# Altium PCB ADS1256.PcbDoc
Units mil, origin at the board's own origin, x right, y up, seen from the top; angles counter-clockwise.
Board outline 2300 x 1853 mil, 4 copper layers (Top Layer, Layer 1, Layer 2, Bottom Layer), stack 23.756 mil thick; 127 components, 75 nets, 419 pads, 325 vias.
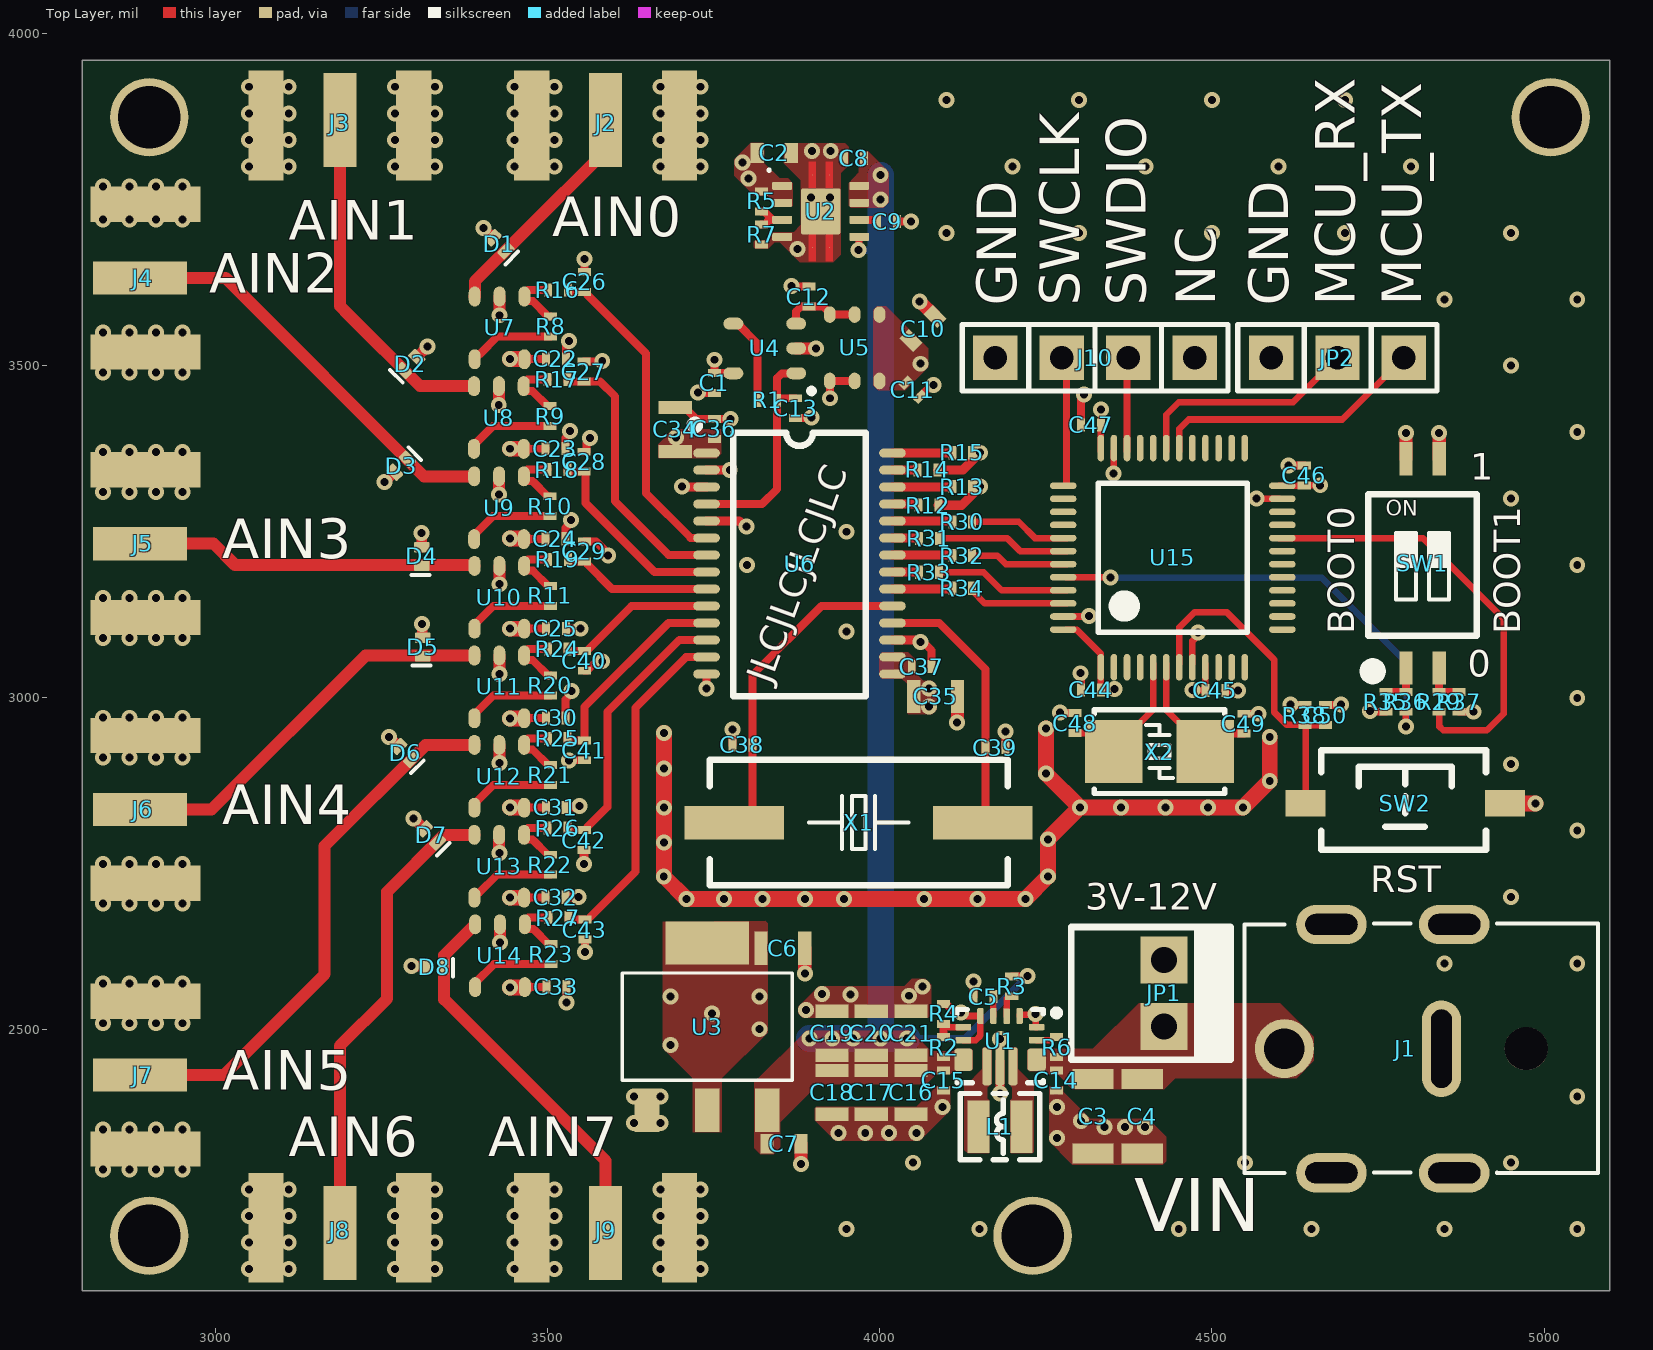
[diagram p0: Top Layer view]
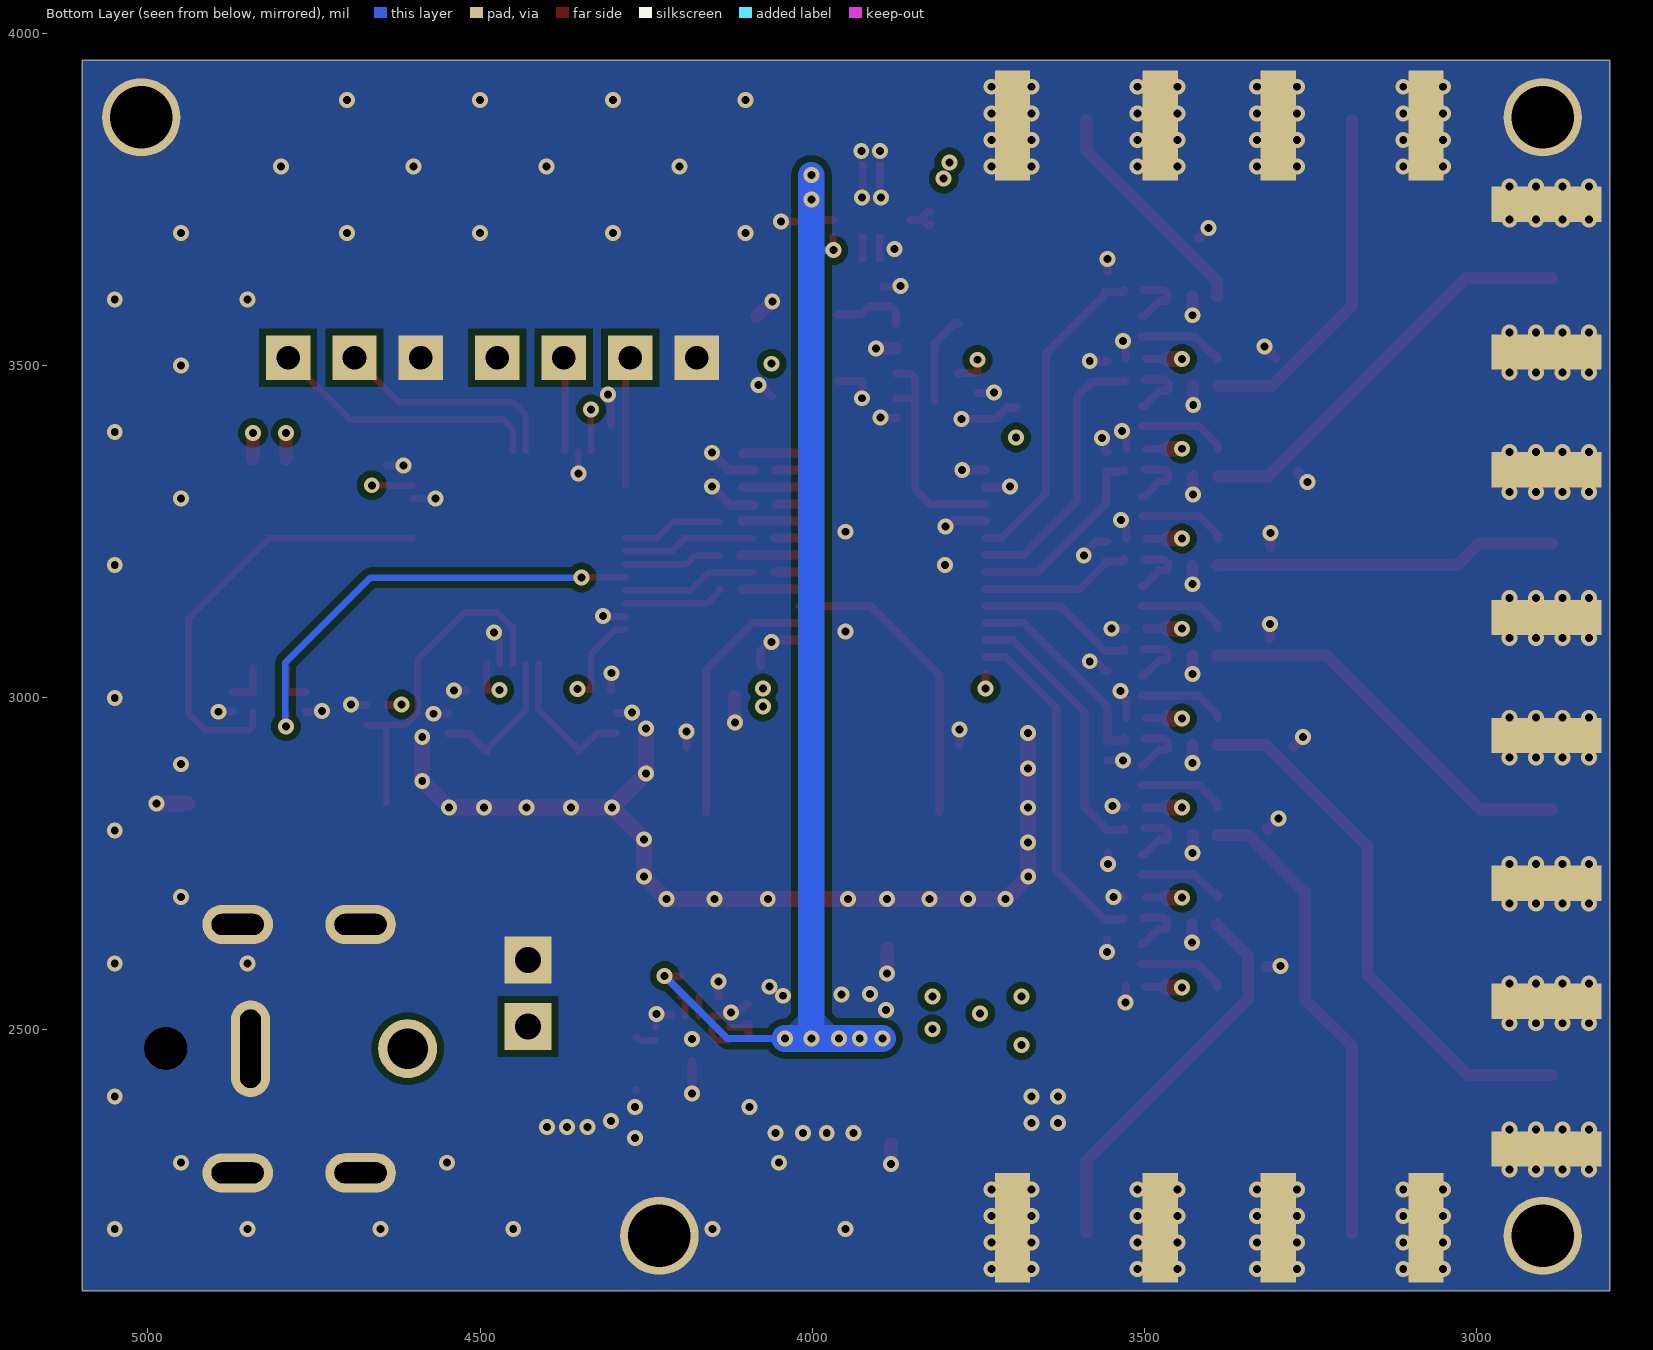
[diagram p1: Bottom Layer view, seen from below]
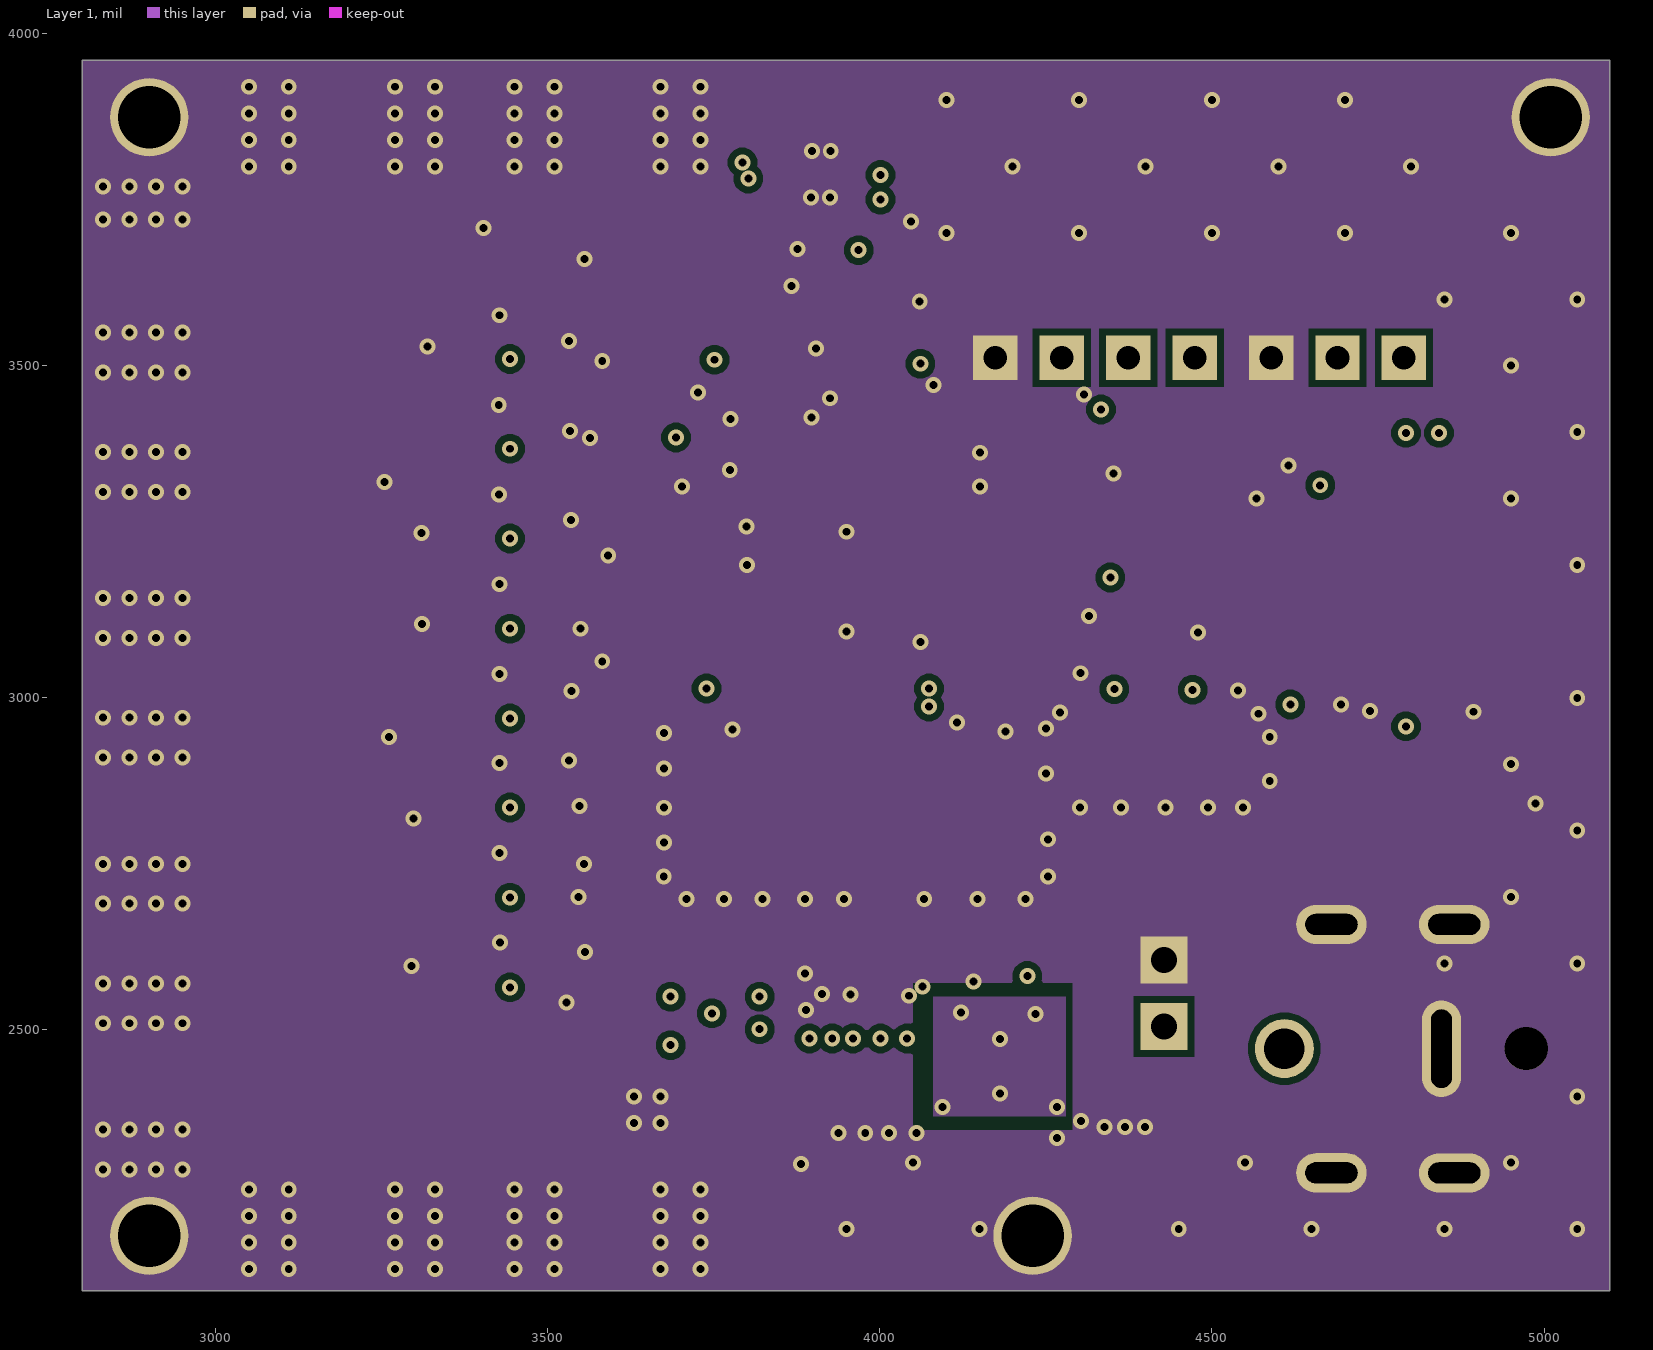
[diagram p2: Layer 1]
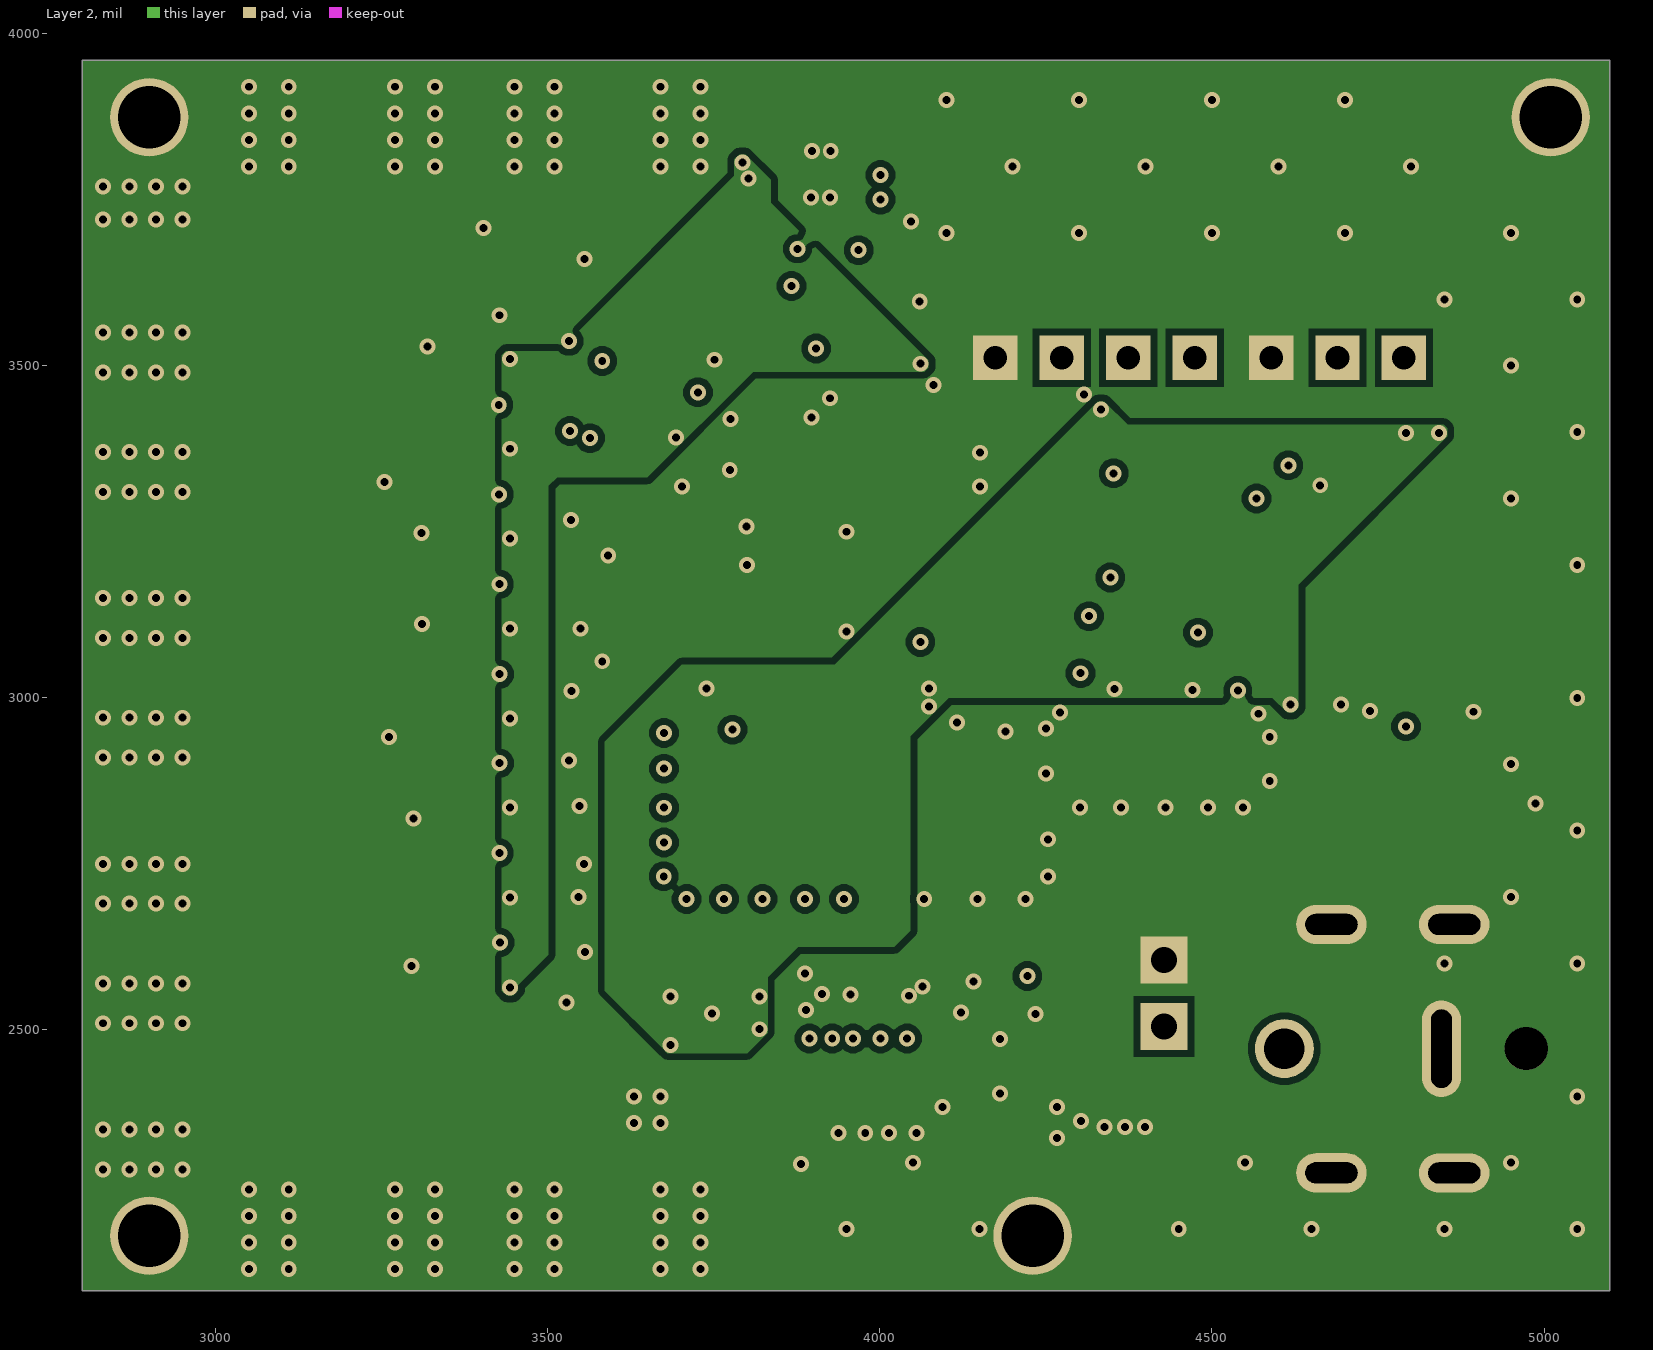
[diagram p3: Layer 2]

## Layer stack, top to bottom
Top Solder: solder mask 0.4, Solder Resist, Dk 3.5
Top Layer: signal copper 1.4
Dielectric 2: prepreg 2.8, PP-006, Dk 4.1
Layer 1: signal copper 1.378
Dielectric 1: dielectric 12.6, FR-4, Dk 4.8
Layer 2: signal copper 1.378
Dielectric 3: prepreg 2.8, PP-006, Dk 4.1
Bottom Layer: signal copper 1.4
Bottom Solder: solder mask 0.4, Solder Resist, Dk 3.5

## Board outline
2799,2107 2799,3960 5099,3960 5099,2107

## Design rules (kind name [scope] priority, off if disabled: settings)
Clearance Clearance_3 [InNet('GND') And OnLayer('Layer 1') vs InNet('GND') And OnLayer('Layer 1')] p1: gap=10 ignorepadtopadclearanceinfootprint=TRUE
Clearance Clearance_4 [OnLayer('Bottom Layer')] p2: gap=10 ignorepadtopadclearanceinfootprint=TRUE
Clearance Clearance_2 [OnLayer('Layer 2')] p3: gap=10 ignorepadtopadclearanceinfootprint=TRUE
Clearance Clearance_1 [OnLayer('Layer 1')] p4: gap=10 ignorepadtopadclearanceinfootprint=TRUE
Clearance [OnLayer('Top Layer') vs OnLayer('Top Layer')] p5: gap=5 ignorepadtopadclearanceinfootprint=TRUE
PlaneConnect [All] p1: planeconnectstyle=Direct reliefexpansion=20 reliefentries=4 reliefconductorwidth=10 reliefairgap=10
PolygonConnect [All] p1: connectstyle=Direct reliefconductorwidth=10 reliefentries=4 polygonreliefangle="90 Angle" airgapwidth=10
RoutingVias [All] p1: holewidth=28 width=50 viastyle="Through Hole" minholewidth=28 minwidth=50 maxholewidth=28 maxwidth=50
SolderMaskExpansion [All] p1: expansion=4 istentingtop=FALSE
Width [All] p1: maxlimit=80 minlimit=8 preferedwidth=10
29 further rules are at their usual default settings.

## Components (designator, comment, footprint, x,y, rotation, side; value= is the part's Value field where it differs from the comment)
C1 "100nF" "C 0402_L" 3751,3474 r90 top
C2 "4.7uF" "C 0603_L" 3840.93,3820.39 r0 top
C3 "22uF" "C 1206_L" 4321,2368.91 r90 top
C4 "22uF" "C 1206_L" 4395,2369 r90 top
C5 "100nF" "C 0402_L" 4156,2550 r180 top
C6 "10uF" "C 0805_L" 3854,2623 r0 top
C7 "4.7uF" "C 0603_L" 3855.59,2328.58 r180 top
C8 "1uF" "C 0402_L" 3960.93,3812.39 r0 top
C9 "4.7nF" "C 0402_L" 4011,3717 r180 top
C10 "1uF" "C 0603_L" 4065,3556 r225 top
C11 "100nF" "C 0402_L" 4049.71,3463.91 r135 top
C12 "100nF" "C 0402_L" 3893,3604 r270 top
C13 "100nF" "C 0402_L" 3873,3436 r90 top
C14 "1uF" "C 0402_L" 4265.75,2423.98 r270 top
C15 "1uF" "C 0402_L" 4096,2424 r270 top
C16 "10uF" "C 0805_L" 4047,2406 r270 top
C17 "10uF" "C 0805_L" 3987,2406 r270 top
C18 "10uF" "C 0805_L" 3928,2406 r270 top
C19 "10uF" "C 0805_L" 3928,2495 r90 top
C20 "10uF" "C 0805_L" 3987,2495 r90 top
C21 "10uF" "C 0805_L" 4047,2495 r90 top
C22 "100nF" "C 0402_L" 3512.35,3510.24 r180 top
C23 "100nF" "C 0402_L" 3511.35,3375.24 r180 top
C24 "100nF" "C 0402_L" 3511.6,3239.49 r180 top
C25 "100nF" "C 0402_L" 3512.09,3104.53 r180 top
C26 "100nF" "C 0402_L" 3555.36,3626.24 r270 top
C27 "100nF" "C 0402_L" 3554.36,3491.24 r270 top
C28 "100nF" "C 0402_L" 3554.6,3355.49 r270 top
C29 "100nF" "C 0402_L" 3555.09,3220.53 r270 top
C30 "100nF" "C 0402_L" 3512,2969.72 r180 top
C31 "100nF" "C 0402_L" 3512,2835 r180 top
C32 "100nF" "C 0402_L" 3511.85,2699.72 r180 top
C33 "100nF" "C 0402_L" 3513,2565 r180 top
C34 "10uF" "C 0805_L" 3692,3404 r90 top
C35 "10uF" "C 0805_L" 4084,3002 r0 top
C36 "100nF" "C 0402_L" 3751,3405 r270 top
C37 "100nF" "C 0402_L" 4063,3047 r180 top
C38 "20pF" "C 0402_L" 3793,2929 r0 top
C39 "20pF" "C 0402_L" 4174,2925 r180 top
C40 "100nF" "C 0402_L" 3555,3055.72 r90 top
C41 "100nF" "C 0402_L" 3555,2921 r90 top
C42 "100nF" "C 0402_L" 3554.85,2785.72 r90 top
C43 "100nF" "C 0402_L" 3556,2651 r90 top
C44 "100nF" "C 0402_L" 4318,3012 r0 top
C45 "100nF" "C 0402_L" 4505,3011 r180 top
C46 "100nF" "C 0402_L" 4639,3335 r270 top
C47 "100nF" "C 0402_L" 4318,3411 r0 top
C48 "20pF" "C 0402_L" 4294,2962 r270 top
C49 "20pF" "C 0402_L" 4548,2961 r270 top
C50 "100nF" "C 0402_L" 4670.92,2973.95 r90 top
D1 "ESD9X5VU-ES" DFN1006-2 3427,3683 r135 top
D2 "ESD9X5VU-ES" DFN1006-2 3293,3503 r45 top
D3 "ESD9X5VU-ES" DFN1006-2 3279,3349 r225 top
D4 "ESD9X5VU-ES" DFN1006-2 3310,3213 r90 top
D5 "ESD9X5VU-ES" DFN1006-2 3311.46,3076.71 r90 top
D6 "ESD9X5VU-ES" DFN1006-2 3285,2917 r135 top
D7 "ESD9X5VU-ES" DFN1006-2 3324,2793 r135 top
D8 "ESD9X5VU-ES" DFN1006-2 3329,2595 r180 top
J1 "DC-007B" DC-007B 4779,2475 r270 top
J2 "SMA-J-P-H-ST-EM1" FP-SMA-J-P-H-ST-EM1-MFG 3587,4132 r180 top
J3 "SMA-J-P-H-ST-EM1" FP-SMA-J-P-H-ST-EM1-MFG 3187,4132 r180 top
J4 "SMA-J-P-H-ST-EM1" FP-SMA-J-P-H-ST-EM1-MFG 2624,3632 r270 top
J5 "SMA-J-P-H-ST-EM1" FP-SMA-J-P-H-ST-EM1-MFG 2624,3232 r270 top
J6 "SMA-J-P-H-ST-EM1" FP-SMA-J-P-H-ST-EM1-MFG 2624,2832 r270 top
J7 "SMA-J-P-H-ST-EM1" FP-SMA-J-P-H-ST-EM1-MFG 2624,2432 r270 top
J8 "SMA-J-P-H-ST-EM1" FP-SMA-J-P-H-ST-EM1-MFG 3187,1932 r0 top
J9 "SMA-J-P-H-ST-EM1" FP-SMA-J-P-H-ST-EM1-MFG 3587,1932 r0 top
J10 "Probe_SW" Probe_SW 4325,3511 r0 top
JP1 "HDR-1X2" KF2510-LI-2P 4428,2555 r270 top
JP2 "HDR-1X3" HDR2.54-LI-3P 4689,3512 r180 top
L1 "FTC252012S1R5MBCA" NR2520 4180.79,2354.31 r180 top
R1 "1K" "R 0402_L" 3830.46,3447.94 r0 top
R2 "300K" "R 0402_L" 4096,2474 r270 top
R3 "100K" "R 0402_L" 4198.55,2565.66 r270 top
R4 "51K" "R 0402_L" 4096,2524 r270 top
R5 "52.5K" "R 0402_L" 3821.93,3747.39 r270 top
R6 "10K" "R 0402_L" 4266,2474 r90 top
R7 "10K" "R 0402_L" 3821.93,3697.39 r90 top
R8 "1K" "R 0402_L" 3504.35,3559.24 r90 top
R9 "1K" "R 0402_L" 3503.35,3424.24 r90 top
R10 "1K" "R 0402_L" 3503.6,3288.49 r90 top
R11 "1K" "R 0402_L" 3504.09,3153.53 r90 top
R12 "10K" "R 0402_L" 4073,3290 r0 top
R13 "10K" "R 0402_L" 4124,3318 r0 top
R14 "10K" "R 0402_L" 4072,3343 r0 top
R15 "10K" "R 0402_L" 4124,3369 r0 top
R16 "1K" "R 0402_L" 3515.35,3614.24 r0 top
R17 "1K" "R 0402_L" 3514.35,3479.24 r0 top
R18 "1K" "R 0402_L" 3514.6,3343.49 r0 top
R19 "1K" "R 0402_L" 3515.09,3208.53 r0 top
R20 "1K" "R 0402_L" 3504,3018.72 r90 top
R21 "1K" "R 0402_L" 3504,2884 r90 top
R22 "1K" "R 0402_L" 3503.85,2748.72 r90 top
R23 "1K" "R 0402_L" 3505,2614 r90 top
R24 "1K" "R 0402_L" 3515,3073.72 r0 top
R25 "1K" "R 0402_L" 3515,2939 r0 top
R26 "1K" "R 0402_L" 3514.85,2803.72 r0 top
R27 "1K" "R 0402_L" 3516,2669 r0 top
R29 "1K" "R 0402_L" 4842,2994 r90 top
R30 "33" "R 0402_L" 4124,3265 r180 top
R31 "33" "R 0402_L" 4074,3240 r180 top
R32 "33" "R 0402_L" 4124,3214 r180 top
R33 "33" "R 0402_L" 4074,3189 r180 top
R34 "33" "R 0402_L" 4124,3165 r180 top
R35 "9K" "R 0402_L" 4762,2994 r270 top
R36 "1K" "R 0402_L" 4792,2994 r90 top
R37 "9K" "R 0402_L" 4872,2994 r90 top
R38 "10K" "R 0402_L" 4639.78,2974.11 r90 top
SW1 "SW-2P" "CSW1.27 SMD-2P" 4817,3200 r0 top
SW2 "3x6x5" "TSW SMD-3*6*2.5" 4791,2846 r0 top
U1 "TPS63070RNMR" FP-RNM0015A-MFG 4180.88,2475.67 r270 top
U2 "TPS7A8001DRBT" DRB0008A_V 3910.93,3732.39 r0 top
U3 "SPX1117M3-L-3-3/TR" SOT230P700X180-3N 3740,2505 r90 top
U4 "AD8605ARTZ" SOT23-5 3874,3488.6 r90 top
U5 "ADR3425ARJZ" SOT23-6L 3962,3527 r90 top
U6 "ADS1256IDBT" SSOP28 3879,3202.16 r0 top
U7 "AD8605ARTZ" SOT23-5 3464.75,3604.24 r180 top
U8 "AD8605ARTZ" SOT23-5 3463.75,3469.24 r180 top
U9 "AD8605ARTZ" SOT23-5 3464,3333.49 r180 top
U10 "AD8605ARTZ" SOT23-5 3464.49,3198.53 r180 top
U11 "AD8605ARTZ" SOT23-5 3464.4,3063.72 r180 top
U12 "AD8605ARTZ" SOT23-5 3464.4,2929 r180 top
U13 "AD8605ARTZ" SOT23-5 3464.25,2793.72 r180 top
U14 "AD8605ARTZ" SOT23-5 3465.4,2659 r180 top
U15 "STM32F103C8T6" STM-LQFP48_L 4441,3211 r90 top
X1 "7.68MHz" "OSC HC-49SMD" 3968,2812 r0 top
X2 "8MHz" "OSC 5032-2P" 4421,2919 r0 top

## Footprints (in the part's own frame and the unit in brackets; to place one, negate y for a bottom-side part, rotate by r counter-clockwise, add the part's x,y. Pads: shape width x height; smd on the part's side, far side on the other; paste and mask are expansions set on the pad)
"C 0402_L" [mil] "无极性贴片电容"
  rect 12x19.68 smd mask+0: 1(-15,0) 2(15,0)
  body extent -20,-10 20,10, height 21
"C 0603_L" [mil] "无极性贴片电容"
  rect 20x30 smd mask+0: 1(-25.59,0) 2(25.59,0)
  body extent -31,-16 31,16, height 32
"C 0805_L" [mil] "无极性贴片电容"
  rect 20x50 smd mask+0: 1(-33,0) 2(33,0)
  body extent -39,-24 39,24, height 20
"C 1206_L" [mil] "无极性贴片电容"
  rect 30x62 smd mask+0: 1(-55.12,0) 2(57.09,0)
  body extent -63,-32 63,32, height 48
"CSW1.27 SMD-2P" [mil] "长：4.14mm，宽：5.4mm，高：2.3mm"
  rect 20x50 smd mask+0: 1(-25,-155) 2(25,-155) 3(25,160) 4(-25,160)
  silkscreen extent -85,-170 81,106, body extent -81,-171 81,171, height 93
DC-007B [mm]
  round 2.25 hole 1.55 mask+0: 1(0.083,-4.318)
  oval 1.5x2.7 hole 0.8 slot 2 at 90 deg mask+0: 2(-4.667,2.182) 2(-4.667,-2.517) 2(4.832,-2.517) 2(4.835,2.182)
  round 1.65 hole 1.65 mask+0: 2(0.083,4.932)
  oval 3.7x1.5 hole 0.8 slot 3 at 0 deg mask+0: 2(0.084,1.69)
  silkscreen extent -4.7,-5.84 4.83,7.68, body extent -4.87,-5.21 5.13,7.79, height 10
DFN1006-2 [mm]
  rrect25% 0.4x0.6 smd mask+0: 1(-0.356,-0.004) 2(0.344,-0.004)
  silkscreen extent -0.71,-0.3 -0.71,0.38, body extent -0.51,-0.3 0.49,0.3, height 0.48
DRB0008A_V [mil] "SON, 8-Leads, Body 3x3mm, Pitch 0.65mm, Thermal Pad 1.50 x 3.8mm"
  rrect29% 30x12 smd paste+0 mask+0: 1(-58.07,38.39) 2(-58.07,12.8) 3(-58.07,-12.8) 4(-58.07,-38.39) 5(58.07,-38.39) 6(58.07,-12.8) 7(58.07,12.8) 8(58.07,38.39)
  round 1 smd mask+0: 9(-12.8,-54.63) 9(-12.8,54.63) 9(12.8,-54.63) 9(12.8,54.63)
  rrect7% 59.06x68.9 smd paste+0 mask+0: 9(0,0)
  Top Layer region: -7.28,34.45 -7.28,74.8 -18.31,74.8 -18.31,34.45
  Top Layer region: 7.28,34.45 7.28,74.8 18.31,74.8 18.31,34.45
  Top Layer region: -7.28,-34.45 -7.28,-74.8 -18.31,-74.8 -18.31,-34.45
  Top Layer region: 7.28,-34.45 7.28,-74.8 18.31,-74.8 18.31,-34.45
  silkscreen extent -80,60 -76,64, body extent -59,-59 59,59, height 39
FP-RNM0015A-MFG [mm]
  rrect40% 0.6x0.25 smd mask+0: 1(-1.15,0.75) 2(-1.143,0.254) 3(-1.15,-0.25) 4(-1.15,-0.75)
  rrect40% 0.25x0.6 smd mask+0: 5(-0.725,-1.4) 6(-0.225,-1.4) 14(-0.225,1.4) 15(-0.725,1.4)
  rrect29% 0.85x0.7 smd mask+0: 7-8(0.525,-1.4) 12-13(0.525,1.4)
  rrect57% 1.45x0.35 smd mask+0: 9(0.775,-0.5) 11(0.775,0.5)
  rrect57% 1.8x0.35 smd mask+0: 10(0.6,0)
  silkscreen extent -1.4,-1.65 1.4,2.28, body extent -1.55,-1.85 1.6,1.85, height 0.25
FP-SMA-J-P-H-ST-EM1-MFG [mm]
  rect 1.27x3.6 smd paste+0 mask+0: 1(0,6.66)
  rect 1.35x4.2 smd paste+0 mask+0: 2(-2.825,6.86) 2(2.825,6.86)
  rect 1.35x4.2 smd far side paste+0 mask+0: 2(-2.825,6.86) 2(2.825,6.86)
  body extent -3.6,-4.92 3.6,9.06, height 0.25
HDR2.54-LI-3P [mm] "排针，3脚"
  rect 1.7x1.7 hole 0.9 mask+0: 1(-2.54,0) 2(0,0) 3(2.54,0)
  silkscreen extent -3.81,-1.27 3.81,1.27, body extent -3.81,-1.27 3.81,1.27, height 8.5
KF2510-LI-2P [mm] "接插件/2A"
  rect 1.8x1.8 hole 1 mask+0: 1(-1.27,0) 2(1.27,0)
  silkscreen extent -2.59,-3.56 2.54,2.54, body extent -2.54,-3.5 2.54,2.4, height 11.05
NR2520 [mm] "2.5mm*2.0mm*1.0mm(长*宽*高）"
  rect 0.85x2 smd mask+0: 1(-0.825,0) 2(0.825,0)
  silkscreen extent -1.52,-1.27 1.52,1.27, body extent -1.25,-1 1.25,1, height 1.1
"OSC 5032-2P" [mm] "5mm*3.2mm*0.8mm(长*宽*高)  淘宝ID:小糖豆的小窝窝"
  rect 2.2x2.4 smd mask+0: 1(-1.75,0) 2(1.75,0)
  silkscreen extent -2.5,-1.6 2.5,1.6, body extent -2.5,-1.6 2.5,1.6, height 0.86
"OSC HC-49SMD" [mm] "淘宝ID:小糖豆的小窝窝"
  rect 3.81x1.27 smd mask+0: 1(-4.75,0) 2(4.75,0)
  silkscreen extent -5.7,-2.4 5.7,2.4, body extent -6.5,-2.32 6.5,2.33, height 4.63
Probe_SW [mm]
  rect 1.7x1.7 hole 0.9 mask+0: 1(-3.835,0.025) 2(-1.295,0.025) 3(1.245,0.025) 4(3.785,0.025)
  silkscreen extent -5.11,-1.24 5.05,1.3
"R 0402_L" [mil] "1/16W贴片电阻 https://item.taobao.com/item.htm?ft=t&id=613637044352"
  rect 12x19.68 smd mask+0: 1(-15,0) 2(15,0)
  body extent -20,-10 20,10, height 12
SOT23-5 [mil]
  oval 18x30 smd mask+0: 1(0,0) 2(37.4,0) 3(74.8,0) 4(74.8,94.49) 5(0,94.49)
  body extent -20,-8 94,102, height 43
SOT23-6L [mm] "3x1.6x1.1mm(长宽高)"
  oval 0.635x0.45 smd mask+0: 1(-1.27,0.95) 2(-1.27,0) 3(-1.27,-0.95) 4(1.27,-0.95) 5(1.27,0) 6(1.27,0.95)
  silkscreen extent -1.75,1.55 -1.55,1.75, body extent -1.4,-1.5 1.4,1.5, height 1.15
SOT230P700X180-3N [mm]
  rect 1.65x0.95 smd mask+0: 1(-3.2,2.3) 2(-3.2,0) 3(-3.2,-2.3)
  rect 1.65x3.2 smd mask+0: 2(3.2,0)
  silkscreen extent -2.05,-3.25 2.05,3.25, body extent -3.5,-3.25 3.5,3.25, height 1.8
SSOP28 [mil] "10.2*7.8*1.9mm"
  oval 40x13.78 smd mask+0: 1(-140,166.34) 2(-140,140.75) 3(-140,115.16) 4(-140,89.57) 5(-140,63.98) 6(-140,38.39) 7(-140,12.8) 8(-140,-12.8) 9(-140,-38.39) 10(-140,-63.98) 11(-140,-89.57) 12(-140,-115.16) 13(-140,-140.75) 14(-140,-166.34) 15(140,-166.34) 16(140,-140.75) 17(140,-115.16) 18(140,-89.57) 19(140,-63.98) 20(140,-38.39) 21(140,-12.8) 22(140,12.8) 23(140,38.39) 24(140,63.98) 25(140,89.57) 26(140,115.16) 27(140,140.75) 28(140,166.34)
  silkscreen extent -162,-200 100,214, body extent -152,-201 152,201, height 65
STM-LQFP48_L [mil] "QFP, 48-Leads, Body 7x7mm, Pitch 0.5mm, IPC High Density"
  oval 40x9.84 smd mask+0: 1(-165,108.27) 2(-165,88.58) 3(-165,68.9) 4(-165,49.21) 5(-165,29.53) 6(-165,9.84) 7(-165,-9.84) 8(-165,-29.53) 9(-165,-49.21) 10(-165,-68.9) 11(-165,-88.58) 12(-165,-108.27) 25(165,-108.27) 26(165,-88.58) 27(165,-68.9) 28(165,-49.21) 29(165,-29.53) 30(165,-9.84) 31(165,9.84) 32(165,29.53) 33(165,49.21) 34(165,68.9) 35(165,88.58) 36(165,108.27)
  oval 9.84x40 smd mask+0: 13(-108.27,-165) 14(-88.58,-165) 15(-68.9,-165) 16(-49.21,-165) 17(-29.53,-165) 18(-9.84,-165) 19(9.84,-165) 20(29.53,-165) 21(49.21,-165) 22(68.9,-165) 23(88.58,-165) 24(108.27,-165) 37(108.27,165) 38(88.58,165) 39(68.9,165) 40(49.21,165) 41(29.53,165) 42(9.84,165) 43(-9.84,165) 44(-29.53,165) 45(-49.21,165) 46(-68.9,165) 47(-88.58,165) 48(-108.27,165)
  silkscreen extent -112,-112 112,112, body extent -177,-177 177,177, height 61
"TSW SMD-3*6*2.5" [mil] "3*6*2.5mm"
  rect 60x40 smd mask+0: 1(-150,-5) 2(150,-5)
  silkscreen extent -126,-75 122,75, body extent -157,-74 157,64, height 102

## Part data
C1 C2 C3 C4 C5 C6 C7 C8 C9 C10 C11 C12 C13 C14 C15 C16 C17 C18 C19 C20 C21 C22 C23 C24 C25 C26 C27 C28 C29 C30 C31 C32 C33 C34 C35 C36 C37 C38 C39 C40 C41 C42 C43 C44 C45 C46 C47 C48 C49 C50: library part C, "贴片电容", BOM名称=贴片电容, 下单链接=https://item.taobao.com/item.htm?ft=t&id=613637044352, 淘宝ID=小糖豆的小窝窝
D1 D2 D3 D4 D5 D6 D7 D8: library part ESD, "ESD保护"
J2 J3 J4 J5 J6 J7 J8 J9: library part CMP-02754-000006-1, "CONN SMA JACK STR 50OHM EDGE MNT", Case/Package=SMA, Dielectric Material=PTFE, Housing Color=Gold, Max Frequency=6GHz, Max Operating Temperature=125°C, Min Operating Temperature=-65°C, Package Quantity=1, Voltage Rating=335V, Body Material=Brass, Body Plating=Gold, Center Contact Plating=Gold, Connector Type=SMA, Contact Material=Copper, Contact Plating=Gold, Depth=13.33mm, Fastening Type=Threaded, Impedance=50R, Insulation Material=Polytetrafluoroethylene, Length=6.35mm, Mount=Edge, Orientation=Straight, Packaging=Tray, Radiation Hardening=No, RoHS Compliant=Yes, Series=SMA, Termination=Solder
JP1: library part "Header 2", "2P接插件", BOM名称=2P接插件, 下单链接=https://item.taobao.com/item.htm?ft=t&id=613637044352, 淘宝ID=小糖豆的小窝窝
JP2: library part "Header 3", "3P接插件", BOM名称=3P接插件, 下单链接=https://item.taobao.com/item.htm?ft=t&id=613637044352, 淘宝ID=小糖豆的小窝窝
L1: library part L-CDRH, "功率屏蔽电感", BOM名称=功率屏蔽电感, 下单链接=https://item.taobao.com/item.htm?ft=t&id=613637044352, 淘宝ID=小糖豆的小窝窝
R1 R2 R3 R4 R5 R6 R7 R8 R9 R10 R11 R12 R13 R14 R15 R16 R17 R18 R19 R20 R21 R22 R23 R24 R25 R26 R27 R29 R30 R31 R32 R33 R34 R35 R36 R37 R38: library part R, "贴片电阻", BOM名称=贴片电阻, 下单链接=https://item.taobao.com/item.htm?ft=t&id=613637044352, 淘宝ID=小糖豆的小窝窝
SW1: "2路编码开关", BOM名称=2路编码开关, 下单链接=https://item.taobao.com/item.htm?ft=t&id=613637044352, 淘宝ID=小糖豆的小窝窝
SW2: library part "TSW 3x6", "3x6轻触开关", BOM名称=3x6轻触开关, 下单链接=https://item.taobao.com/item.htm?ft=t&id=613637044352, 淘宝ID=小糖豆的小窝窝
U1: library part CMP-04918-000409-1, "IC REG BCK BST ADJ 3.6A 15VQFN", Case/Package=VQFN, Max Input Voltage=16V, Max Operating Temperature=125°C, Max Output Voltage=9V, Min Input Voltage=2V, Min Operating Temperature=-40°C, Min Output Voltage=2.5V, Output Current=2A, Quiescent Current=50uA, Switching Frequency=2.4MHz, Lead Free="Lead Free", Mount="Surface Mount", Number of Outputs=1, Number of Pins=15, Output Configuration=Positive, Output Type=Adjustable, Packaging="Tape and Reel", RoHS Compliant=Yes, Synchronous Rectifier=Yes, Topology=Buck-Boost
U2: library part CMP-0395-00597-2, "Single Output LDO, 1 A, Adjustable 0.8 to 6 V Output, 2.2 to 6.5 V Input, with High-Bandwidth PSRR, 8-pin SON (DRB), -40 to 125 degC, Green (RoHS & no Sb/Br)", Manufacturer="Texas Instruments", Accuracy(%)=3, ComponentLink1Description="Manufacturer URL", ComponentLink1URL=http://www.ti.com/, ComponentLink2Description=Datasheet, ComponentLink2URL=http://www.ti.com/general/docs/lit/getliterature.tsp?genericPartNumber=TPS7A8001&fileType=pdf, ComponentLink3Description="Package Specification", ComponentLink3URL=http://www.ti.com/litv/pdf/mpds118h, DatasheetVersion=SBVS135G, Eco-Plan="Green (RoHS & no Sb/Br)", Iout(Max)(A)=1, Iq(Typ)(mA)=0.04, Mounting Technology="Surface Mount", PackageDescription="8-Pin Plastic Small Outline, Body 3 x 3 mm, Pitch 0.65 mm", PackageReference=DRB0008A, PackageVersion=4203482-2/K, PartNumber=TPS7A8001DRBT, SubFamily="Single Channel LDO", Vdo(Typ)(mV)=170, Vin(Max)(V)=6.5, Vin(Min)(V)=2.2, Vout Adj(Max)(V)=6, Vout Adj(Min)(V)=0.8
U3: "Linear Voltage Regulator IC Positive Fixed 1 Output 800mA SOT-223", Package="SOT-223 Exar", Availability=Unavailable, MF="MaxLinear, Inc.", MP=SPX1117M3-L-3-3/TR, Price=None, SnapEDA_Link=https://www.snapeda.com/parts/SPX1117M3-L-3-3/TR/MaxLinear%2C%20Inc./view-part/376705/?ref=snap
U4 U7 U8 U9 U10 U11 U12 U13 U14: "Precision Low Noise CMOS Rail-to-Rail Input/Output Operational Amplifiers"
U5: "Micropower, High Accuracy / Voltage References, 2.5V", Case/Package=SOT, Max Input Voltage=6V, Max Operating Temperature=125°C, Max Output Current=10mA, Max Output Voltage=2.5V, Min Input Voltage=2.7V, Min Operating Temperature=-40°C, Nominal Supply Current=85uA, Package Quantity=1, Quiescent Current=100uA, Temperature Coefficient=8ppm/°C, Tolerance=0.1%, Lead Free="Contains Lead", Min Output Voltage=2.5V, Number of Channels=1, Number of Pins=6, Operating Supply Current=85uA, Output Current=10mA, Output Type=Fixed, Output Voltage=2.5V, Packaging="Tape and Reel", Radiation Hardening=No, REACH SVHC="No SVHC", Reference Type=Series, Reference Voltage=2.5V, RoHS Compliant=Yes, Series=-, Supply Current=85uA
U6: "24-Bit, 30 kSPS Very Low Noise Delta-Sigma ADC with Multiplexer, -40 to 85 degC, 28-pin SOP (DB28), Green (RoHS & no Sb/Br)", Analog Voltage AV/DD(Max)(V)=5.25, Analog Voltage AV/DD(Min)(V)=4.75, Manufacturer="Texas Instruments", # Input Channels=8, Architecture=Delta-Sigma, Code_JEDEC=MO-150, ComponentLink1Description="Manufacturer URL", ComponentLink1URL=http://www.ti.com/, ComponentLink2Description=Datasheet, ComponentLink2URL=http://www.ti.com/general/docs/lit/getliterature.tsp?genericPartNumber=ADS1256&fileType=pdf, ComponentLink3Description="Package Specification", ComponentLink3URL=http://www.ti.com/lit/ml/msso002e/msso002e.pdf, DatasheetVersion=SBAS288J, Digital Supply(Max)(V)=3.6, Digital Supply(Min)(V)=1.8, Eco-Plan="Green (RoHS & no Sb/Br)", Interface="Serial SPI", Mounting Technology="Surface Mount", PackageDescription="28-Pin Plastic Small Outline, Body 10.2 X 5.3 mm, Pitch 0.65 mm", PackageReference=DB28, PackageVersion="4040065/E, 12/2001", PartNumber=ADS1256IDBT, Resolution(Bits)=24, Sample Rate (max)(SPS)=30k, SubFamily="Precision ADC (<=10MSPS)"
U15: library part CMP-0237-00215-3, "ARM Cortex-M3 32-bit MCU, 64 KB Flash, 20 KB Internal RAM, 37 I/Os, 48-pin LQFP, -40 to 85 degC, Tray", I/Os (High Current)=37, Operating Frequency(F) (Processor speed) (MHz)=72, Supply Voltage(Vcc) min (V)=2, A/D Converter="2x12-bit (10 Channel)", ComponentLink1Description="Manufacturer URL", ComponentLink1URL=http://www.st.com/web/en/home.html, ComponentLink2Description=Datasheet, ComponentLink2URL=http://www.st.com/st-web-ui/static/active/en/resource/technical/document/datasheet/CD00161566.pdf, ComponentLink3Description="Package Specification", ComponentLink3URL=http://www.st.com/st-web-ui/static/active/en/resource/technical/document/datasheet/DM00058181.pdf, Core="ARM Cortex-M3", DatasheetVersion="Rev. 16", FLASH Size (Prog) (kB)=64, Internal RAM Size (kB)=20, Mounting Technology="Surface Mount", PackageDescription="48-Pin Low Profile Quad Flat Package, 7 x 7 mm Body, 0.5 mm Pitch", PackageReference=LQFP48, PackageVersion="Rev. 6, 06/2013", Packing=Tray, PartNumber=STM32F103C8T6
X1 X2: library part XTAL-2P, "2脚无源脚晶振", BOM名称=2脚无源脚晶振, 下单链接=https://item.taobao.com/item.htm?ft=t&id=613637044352, 淘宝ID=小糖豆的小窝窝

## Free pads (board coordinates)
  round 118.11 hole 94.49 mask+0: 1(2900,2190) 1(2900,3874) 1(4230,2190) 1(5010,3874)

## Via types
v1: diameter 24, hole 12, Top Layer to Bottom Layer, tented both sides, 325 vias

## Nets (pads, with @x,y where several pads share a name; then routed paths per layer and width w, separated by ;. In a path a pad name is that pad's centre, name@x,y a point inside that pad or via, vN(x,y) a via of type N, cw(c..) or ccw(c..) an arc to the next point about the centre after c; other vN are vias at no path point)
+3.3: C6.1 C35.1 C37.2 C44.2 C45.2 C46.2 C47.2 R38.2 SW1.3 SW1.4 U3.2 U6.14 U6.15 U6.16 U15.1 U15.9 U15.24 U15.36 U15.48 | length 446.7
  Top Layer w9.84: U15.48@4281,3102.73 4296.08,3102.73 4332.73,3066.08 4332.73,3051 4332.73,3012.26 C44.2 4333.5,3012.5 4352.5,3012.5 v1(4353,3013) ; U15.36@4332.73,3371 C47.2@4332.73,3410.73 ; C47.2 v1(4333,3434) ; v1(4471,3012) 4471.5,3011.5 4489.5,3011.5 C45.2 ; C45.2@4490.21,3011.22 U15.9@4490.21,3051 ; U15.24@4601,3319.27 C46.2@4638.26,3319.27 ; C46.2 v1(4663,3320)
  Top Layer w12: v1(3739,3014) U6.14 ; v1(4618,2990) 4618.89,2989.11 R38.2
  Top Layer w20: SW1.4 v1(4792,3399) ; SW1.3 v1(4842,3399)
  other v1: 3685,2477 3819,2501 3747,2525 3685,2550 3819,2550 4074,2987 4074,3014
+5: C1.2 C2.1 C10.2 C11.2 C22.2 C23.2 C24.2 C25.2 C30.2 C31.2 C32.2 C33.2 C34.1 C36.2 R5.1 U2.1 U2.2 U4.5 U5.3 U5.4 U6.1 U7.5 U8.5 U9.5 U10.5 U11.5 U12.5 U13.5 U14.5 | length 484.6
  Top Layer w12: U8.5 3464,3375 3496.35,3375 C23.2 ; U9.5 3496.6,3239 C24.2 ; U12.5 3497,2834.51 C31.2 ; U13.5@3464.49,2699.48 3496.85,2699.48 C32.2 ; U10.5 3497.09,3104.04 C25.2 ; U11.5@3464.65,2969.48 3497,2969.48 C30.2 ; U7.5@3465,3510 3497.35,3510 C22.2 ; U14.5 3498,2564.51 C33.2 ; v1(3751,3509) C1.2 3779.11,3489 U4.5
  Top Layer w24: v1(3443,2564) 3464.89,2564 U14.5 ; v1(3443,2699) 3464.01,2699 U13.5 ; v1(3443,2835) 3463.91,2835 U12.5 ; v1(3443,2969) 3464.17,2969 U11.5 ; v1(3443,3104) 3464.45,3104 U10.5 ; v1(3443,3240) 3463,3240 U9.5 ; v1(3443,3375) 3463.51,3375 U8.5 ; v1(3443,3510) U7.5@3465,3510
  other v1: 3693,3392 4061,3503 3802,3782 3793,3806
+5.5: C7.2 C8.2 C15.1 C16.1 C17.1 C18.1 C19.1 C20.1 C21.1 R2.2 R3.1 U1.7-8 U2.5 U2.7 U2.8 U3.3 | length 1743.9
  Top Layer w11: v1(3968,3674) 3968.5,3674.5 3968.5,3693.5 U2.5 ; R3.1 4198.72,2580.83 4221.83,2580.83 v1(4222,2581)
  Bottom Layer w11: v1(3968,3674) 4001,3674 ; v1(4041,2487) 4128,2487 v1(4222,2581)
  Bottom Layer w40: v1(3894,2487) v1(3928.31,2487) v1(3959.58,2487) v1(4001,2487) ; v1(4001,3787) v1(4001,3750) 4001,3674 v1(4001,2487) ; v1(4041,2487) v1(4001,2487)
AIN0: C26.2 R16.2 U6.6 | length 490.8
  Top Layer w12: R16.2 3530.35,3611.24 C26.2 3559.2,3611.24 3559.2,3607.4 3648,3518.6 3648,3308 3715.12,3240.88 3738.66,3240.88 U6.6
AIN1: C27.2 R17.2 U6.7 | length 413.4
  Top Layer w12: R17.2 3529.35,3476.24 C27.2 3578.76,3476.24 3601,3454 3601,3296 3682.05,3214.95 U6.7
AIN2: C28.2 R18.2 U6.8 | length 302.6
  Top Layer w12: R18.2 3529.6,3340.49 3556.71,3340.49 3556.71,3293.39 3660.73,3189.36 U6.8
AIN3: C29.2 R19.2 U6.9 | length 231.5
  Top Layer w12: R19.2 3530.09,3205.53 C29.2 3558.93,3205.53 3558.93,3201.69 3596.85,3163.77 U6.9
AIN4: C40.2 R24.2 U6.10 | length 239.9
  Top Layer w12: R24.2 3530,3070.72 C40.2 3558.85,3070.72 3626.3,3138.18 U6.10
AIN5: C41.2 R25.2 U6.11 | length 314.4
  Top Layer w12: R25.2 3530,2936 C41.2 3555,2986 3681.59,3112.59 U6.11
AIN6: C42.2 R26.2 U6.12 | length 416.8
  Top Layer w12: R26.2 3529.85,2800.72 C42.2 3558.69,2800.72 3558.69,2804.57 3590,2835.87 3590,2979 3698,3087 U6.12
AIN7: C43.2 R27.2 U6.13 | length 519.4
  Top Layer w12: R27.2 3531,2666 3559.85,2666 3632,2738.15 3632,2985 3708.41,3061.41 U6.13
BOOT0: R35.1 R36.2 SW1.1 | length 66
  Top Layer w12: R35.1 R36.2 SW1.1
BOOT1: R29.2 R37.2 SW1.2 | length 66
  Top Layer w12: SW1.2 R29.2 R37.2
C\S\: R34.2 U6.20 | length 86.4
  Top Layer w13.78: U6.20 4105.02,3163.77 R34.2@4105.26,3164.01
D\R\D\Y\: R33.2 U6.21 | length 38.3
  Top Layer w13.78: U6.21 R33.2@4057.29,3189.36
DIN: R31.2 U6.23 | length 37.1
  Top Layer w13.78: U6.23 4055.24,3240.54 R31.2@4055.86,3241.16
DOUT: R32.2 U6.22 | length 89
  Top Layer w13.78: U6.22 4107.45,3214.95 R32.2@4107.86,3214.54
GND: C1.1 C2.2 C3.1 C4.1 C5.2 C6.2 C7.1 C8.1 C9.1 C10.1 C11.1 C12.1 C13.1 C14.2 C15.2 C16.2 C17.2 C18.2 C19.2 C20.2 C21.2 C22.1 C23.1 C24.1 C25.1 C26.1 C27.1 C28.1 C29.1 C30.1 C31.1 C32.1 C33.1 C34.2 C35.2 C36.1 C37.1 C38.1 C39.1 C40.1 C41.1 C42.1 C43.1 C44.1 C45.1 C46.1 C47.1 C48.1 C49.1 C50.2 D1.2 D2.2 D3.2 D4.2 D5.2 D6.2 D7.2 D8.2 J1.2 J2.2 J3.2 J4.2 J5.2 J6.2 J7.2 J8.2 J9.2 J10.1 JP1.1 JP2.3 pad.1 R4.1 R7.1 R12.2 R13.2 R14.2 R15.2 R35.2 R37.1 SW2.2 U1.1 U1.4 U1.6 U1.10 U1.15 U2.4 U2.9 U3.1 U4.2 U5.1 U5.2 U6.2 U6.3 U6.5 U6.17 U7.2 U8.2 U9.2 U10.2 U11.2 U12.2 U13.2 U14.2 U15.8 U15.23 U15.35 U15.47 | length 3813.2
  Top Layer w9.84: v1(4122,2526) 4125.83,2526 4130.89,2520.94 U1.4 4151.35,2491.67 4144.21,2484.53 U1.6 ; U1.1 4210.41,2522.47 4232.47,2522.47 v1(4234,2524) 4235,2523 4235,2504.21 U1.15 ; U15.47@4281,3122.42 4314.42,3122.42 v1(4315,3123) ; v1(4352,3338) 4352.42,3338.42 U15.35@4352.42,3371 ; U15.8@4470.53,3051 4470.53,3085.7 4479,3094.17 v1(4479,3098) ; v1(4567,3300) 4567.42,3299.58 U15.23@4601,3299.58
  Top Layer w12: v1(3261,2941) v1@3261.12,2941 ; D6.2@3275.42,2926.7 D6.2 ; v1(3310,3248) v1@3310.09,3247.91 ; D4.2@3310.09,3226.64 D4.2 ; v1(3310.76,3111.36) v1@3311.2,3110.92 ; D5.2@3311.2,3090.7 D5.2 ; C23.1 3526.35,3391.32 3533.46,3398.43 v1(3533.46,3401.67) ; C24.1 3526.6,3255.53 3535.25,3264.18 v1(3535.25,3267.43) ; C30.1 3527,2997.75 3536,3006.75 v1(3536,3010) ; C22.1 3527.35,3529.11 3532,3533.75 v1(3532,3537) ; v1(3528,2541) C33.1 ; C25.1@3528.35,3104.45 3548.55,3104.45 v1(3549,3104) ; v1(3532.15,2905.42) 3532.73,2906 C41.1 ; C27.1 3581.24,3506.24 v1(3582,3507) ; C28.1 3558.45,3370.49 3558.45,3382.62 3563.46,3387.63 v1(3563.46,3390.88) ; C40.1 3558.84,3040.72 3570.82,3052.7 3579.7,3052.7 v1(3582,3055) ; v1(3555,3661) 3555.18,3660.82 3555.18,3641.24 C26.1 ; C29.1 3572.72,3235.53 3591,3217.25 v1(3591,3214) ; v1(3556,2617) C43.1 ; C34.2 3707,3437 3711,3433 3711,3432.15 3723.16,3420 C36.1 v1(3775,3420) ; v1(3726,3460) 3727,3459 C1.1 ; C38.1 v1(3778,2952) ; v1(3867,3620) 3868,3619 C12.1 ; C13.1 3896,3421 v1(3897,3422) ; v1(3925,3451) 3924.8,3451.2 3924.8,3476.81 U5.1 U5.2 ; C9.1 v1(4047,3717) ; C11.1 4078.02,3471 v1(4081,3471) ; v1(4061,3084) 4063.3,3081.7 4067.72,3081.7 4078,3071.43 C37.1 ; R4.1 4099.84,2539 4110.55,2528.3 4119.7,2528.3 v1(4122,2526) ; C5.2 v1(4141,2573) ; C39.1 v1(4189,2949) ; C14.2@4265.37,2408.98 C14.2 ; v1(4271,2978) 4272,2977 C48.1 ; v1(4302,3037) 4303,3036 C44.1 ; C47.1 4303,3449.3 4307.03,3453.33 v1(4307.03,3456.57) ; C45.1 v1(4539,3011) ; C49.1 v1(4570,2976) ; v1(4615,3350) C46.1 ; C50.2 4692.95,2988.95 v1(4694,2990) ; v1(4738,2980) 4739,2979 R35.2 ; R37.1 v1(4894,2979)
  Top Layer w13.78: C31.1@3529.15,2835.49 3546.49,2835.49 v1(3548,2837) ; C32.1@3532.03,2699.67 3545.67,2699.67 v1(3546,2700) ; C42.1@3554.61,2766.74 3554.61,2750.11 v1(3554.71,2750.01) ; v1(3702,3318) 3702.68,3317.32 U6.3 ; U6.5 3788.1,3266.13 3796.23,3258 v1(3799,3258) ; U6.2 3773.91,3342.91 v1(3774,3343) ; U6.17 4058,3087 v1(4061,3084) ; R14.2 4125,3343 v1(4151,3369) ; R12.2 4123,3290 v1(4151,3318) ; v1(4180.79,2404.31) 4181,2404.52 U1.10@4181,2452.38
  Top Layer w16: v1@3254.38,3325 D3.2@3268.92,3339.54 ; v1@3261.12,2941 D6.2@3275.42,2926.7 ; v1(3295,2596) 3295.41,2595.59 3315.32,2595.59 3315.45,2595.46 D8.2 ; v1(3298,2818) 3298.62,2818 3314.14,2802.48 3314.32,2802.48 D7.2 ; D2.2@3302.7,3512.58 v1@3319,3528.88 ; D4.2@3310.09,3226.64 v1@3310.09,3247.91 ; D5.2@3311.2,3090.7 v1@3311.2,3110.92 ; v1(3403.03,3707.22) D1.2
  Top Layer w18: v1(3426.16,3441) 3426.35,3441.19 U8.2 ; U9.2 3426.6,3306.56 v1(3426.8,3306.36) ; U13.2 3426.85,2766.6 v1(3427.1,2766.35) ; U12.2 3427,2901.73 v1(3427.2,2901.53) ; U11.2 3427,3035.82 v1(3427.17,3035.66) ; v1(3427,3171) 3427.09,3171.09 U10.2 ; v1(3427,3576) 3427.35,3576.35 U7.2 ; v1(3427.99,2631.51) U14.2 ; U4.2 v1(3904,3526)
  Top Layer w20: v1(3881,2298) 3881.18,2298.18 C7.1 ; v1(3887,2585) C6.2 ; v1(4060,3597) 4060.2,3597 C10.1 ; v1(4116,2963) 4116,2964.08 4117,2965.08 C35.2
  Top Layer w24: v1(3675,2947) v1(3675,2834.5) v1(3675,2782.3) 3675,2731 v1(3709,2697) v1(4219,2697) v1(4253,2731) v1(4253,2787) v1(4301,2835) ; v1(4250,2954) v1(4250,2886) v1(4301,2835) ; v1(4587,2940.72) v1(4587,2875) v1(4547,2835) v1(4363,2835) v1(4301,2835) ; SW2.2 v1(4987,2841)
  other v1: 3050,2140 3110,2140 3270,2140 3330,2140 3450,2140 3510,2140 3670,2140 3730,2140 3050,2180 3110,2180 3270,2180 3330,2180 3450,2180 3510,2180 3670,2180 3730,2180 3950,2200 4150,2200 4450,2200 4650,2200 4850,2200 5050,2200 3050,2220 3110,2220 3270,2220 3330,2220 3450,2220 3510,2220 3670,2220 3730,2220 3050,2260 3110,2260 3270,2260 3330,2260 3450,2260 3510,2260 3670,2260 3730,2260 2830,2290 2870,2290 2910,2290 2950,2290 4050,2300 4550,2300 4950,2300 4267,2337 3938,2345 3978,2345 4014,2345 4055,2345 2830,2350 2870,2350 2910,2350 2950,2350 4338,2354 4369,2354 4399,2354 3630,2360 3670,2360 4303,2363 4094,2384 4267,2384 3630,2400 3670,2400 5050,2400 4181,2486 2830,2510 2870,2510 2910,2510 2950,2510 3889,2530 4043.58,2551.43 3956,2553 3913,2554 4064,2565 2830,2570 2870,2570 2910,2570 2950,2570 4850,2600 5050,2600 2830,2690 2870,2690 2910,2690 2950,2690 3765.48,2697 3823.37,2697 3887.18,2697 3945.86,2697 4066.78,2697 4146.73,2697 4950,2700 3674.59,2731.19 2830,2750 2870,2750 2910,2750 2950,2750 5050,2800 4430,2835 4494,2835 3675,2893.36 4950,2900 2830,2910 2870,2910 2910,2910 2950,2910 2830,2970 2870,2970 2910,2970 2950,2970 5050,3000 2830,3090 2870,3090 2910,3090 2950,3090 3950,3100 2830,3150 2870,3150 2910,3150 2950,3150 3800,3200 5050,3200 3950,3250 4950,3300 2830,3310 2870,3310 2910,3310 2950,3310 3254,3325 2830,3370 2870,3370 2910,3370 2950,3370 5050,3400 2830,3490 2870,3490 2910,3490 2950,3490 4950,3500 3319,3529 2830,3550 2870,3550 2910,3550 2950,3550 4850,3600 5050,3600 3876,3676 4100,3700 4300,3700 4500,3700 4700,3700 4950,3700 2830,3720 2870,3720 2910,3720 2950,3720 3896,3753 3925,3753 2830,3770 2870,3770 2910,3770 2950,3770 3050,3800 3110,3800 3270,3800 3330,3800 3450,3800 3510,3800 3670,3800 3730,3800 4200,3800 4400,3800 4600,3800 4800,3800 3898,3823 3926,3823 3050,3840 3110,3840 3270,3840 3330,3840 3450,3840 3510,3840 3670,3840 3730,3840 3050,3880 3110,3880 3270,3880 3330,3880 3450,3880 3510,3880 3670,3880 3730,3880 4100,3900 4300,3900 4500,3900 4700,3900 3050,3920 3110,3920 3270,3920 3330,3920 3450,3920 3510,3920 3670,3920 3730,3920
L1: L1.1 U1.11
L2: L1.2 U1.9
MCU_USART1_RX: JP2.2 U15.31 | length 348.6
  Top Layer w9.84: U15.31@4431.16,3371 4431.16,3426.16 4450,3445 4622,3445 JP2.2
MCU_USART1_TX: JP2.1 U15.30 | length 416.4
  Top Layer w9.84: U15.30@4450.84,3371 4450.84,3404.84 4465,3419 4696,3419 JP2.1
NetC5_1: C5.1 U1.3 | length 29.1
  Top Layer w9.84: C5.1 C5.1 U1.3
NetC9_2: C9.2 U2.6 | length 29.6
  Top Layer w12: U2.6 3996,3719.59 C9.2
NetC12_2: C12.2 U4.3 U5.5 U5.6 | length 114.4
  Top Layer w12: U4.3 3874,3581.97 3881.03,3589 C12.2 3914.7,3589 3926.69,3577.01 U5.5
NetD1_1: D1.1 J2.1 U7.3 | length 347.2
  Top Layer w18: U7.3 3390.14,3604.43 3390.14,3627.07 3465.16,3702.09 3587,3823.93 J2.1
NetD2_1: D2.1 J3.1 U8.3 | length 531.8
  Top Layer w18: J3.1 3187,3590 3200.62,3576.38 3307.76,3469.24 U8.3
NetD3_1: D3.1 J4.1 U9.3 | length 626.6
  Top Layer w18: J4.1 3015,3632 3313.51,3333.49 U9.3
NetD4_1: D4.1 J5.1 U10.3 | length 517.3
  Top Layer w18: J5.1 2997,3232 3029,3200 3388.21,3200 U10.3
NetD5_1: D5.1 J6.1 U11.3 | length 599.4
  Top Layer w18: J6.1 2994,2832 3225.72,3063.72 U11.3
NetD6_1: D6.1 J7.1 U12.3 | length 822.3
  Top Layer w18: J7.1 3012,2432 3164,2584 3164,2777 3316,2929 U12.3
NetD7_1: D7.1 J8.1 U13.3 | length 710.2
  Top Layer w18: J8.1 3187,2476 3258,2547 3258,2708 3343.72,2793.72 U13.3
NetD8_1: D8.1 J9.1 U14.3 | length 584.8
  Top Layer w18: U14.3 3344,2612.4 3344,2546 3587,2303 J9.1
NetR1_1: R1.1 U4.4 | length 133.9
  Top Layer w12: U4.4 3785.51,3563.4 3815.46,3533.46 R1.1
NetR2_1: R2.1 R4.2 U1.5 | length 51.7
  Top Layer w9.84: R4.2 4099.84,2509 4104.63,2504.21 U1.5
  Top Layer w12: R2.1 R4.2
NetR3_2: R3.2 U1.2 | length 35.4
  Top Layer w9.84: U1.2 4190.88,2546.83 4194.71,2550.66 R3.2
NetR5_2: R5.2 R7.2 U2.3 | length 50.3
  Top Layer w12: R7.2 3825.77,3712.39 3832.98,3719.59 ; R5.2 3825.77,3732.39 3838.57,3719.59 U2.3
NetR6_2: R6.2 U1.14 | length 31.9
  Top Layer w9.84: U1.14 4257.69,2484.53 4262.16,2489 R6.2
NetR8_1: R8.1 U7.4 | length 131.3
  Top Layer w12: U7.4 3389.95,3514.13 3392.72,3516.9 3397.1,3516.9 3424.44,3544.24 R8.1
NetR8_2: R8.2 R16.1 U7.1 | length 96.9
  Top Layer w12: R16.1 3470.38,3614.24 3464.75,3608.62 U7.1 3464.75,3599.87 3467.53,3597.09 3477.66,3597.09 3500.51,3574.24 R8.2
NetR9_1: R9.1 U8.4 | length 132.2
  Top Layer w12: U8.4 3388.95,3380.75 3417.44,3409.24 R9.1
NetR9_2: R9.2 R17.1 U8.1 | length 96.9
  Top Layer w12: R17.1 3469.38,3479.24 3463.75,3473.62 U8.1 3463.75,3464.87 3466.53,3462.09 3476.66,3462.09 3499.51,3439.24 R9.2
NetR10_1: R10.1 U9.4 | length 132.2
  Top Layer w12: U9.4 3389.2,3245 3417.68,3273.49 R10.1
NetR10_2: R10.2 R18.1 U9.1 | length 96.9
  Top Layer w12: R18.1 3469.62,3343.49 3464,3337.86 U9.1 3464,3329.11 3466.77,3326.34 3476.9,3326.34 3499.76,3303.49 R10.2
NetR11_1: R11.1 U10.4 | length 132.2
  Top Layer w12: U10.4 3389.68,3110.04 3418.17,3138.53 R11.1
NetR11_2: R11.2 R19.1 U10.1 | length 96.9
  Top Layer w12: R19.1 3470.11,3208.53 3464.49,3202.9 U10.1 3464.49,3194.15 3467.26,3191.38 3477.39,3191.38 3500.24,3168.53 R11.2
NetR12_1: R12.1 U6.25 | length 34.9
  Top Layer w13.78: U6.25 4052.99,3291.72 R12.1@4053.61,3291.11
NetR13_1: R13.1 U6.26 | length 85.4
  Top Layer w13.78: U6.26 R13.1@4104.38,3317.32
NetR14_1: R14.1 U6.27 | length 35.7
  Top Layer w13.78: U6.27 4053.81,3342.91 R14.1@4054.43,3343.52
NetR15_1: R15.1 U6.28 | length 86.2
  Top Layer w13.78: U6.28 4104.58,3368.5 R15.1@4104.99,3368.09
NetR20_1: R20.1 U11.4 | length 132.2
  Top Layer w12: U11.4 3389.6,2975.23 3418.09,3003.72 R20.1
NetR20_2: R20.2 R24.1 U11.1 | length 96.9
  Top Layer w12: R24.1 3470.03,3073.72 3464.4,3068.1 U11.1 3464.4,3059.35 3467.17,3056.57 3477.31,3056.57 3500.16,3033.72 R20.2
NetR21_1: R21.1 U12.4 | length 132.2
  Top Layer w12: U12.4 3389.6,2840.51 3418.09,2869 R21.1
NetR21_2: R21.2 R25.1 U12.1 | length 96.9
  Top Layer w12: R25.1 3470.03,2939 3464.4,2933.38 U12.1 3464.4,2924.62 3467.17,2921.85 3477.31,2921.85 3500.16,2899 R21.2
NetR22_1: R22.1 U13.4 | length 131.3
  Top Layer w12: U13.4 3389.44,2703.61 3392.22,2706.38 3396.59,2706.38 3423.93,2733.72 R22.1
NetR22_2: R22.2 R26.1 U13.1 | length 96.9
  Top Layer w12: R26.1 3469.87,2803.72 3464.25,2798.1 U13.1 3464.25,2789.35 3467.02,2786.58 3477.15,2786.58 3500,2763.72 R22.2
NetR23_1: R23.1 U14.4 | length 132.2
  Top Layer w12: U14.4 3390.6,2570.51 3419.09,2599 R23.1
NetR23_2: R23.2 R27.1 U14.1 | length 96.9
  Top Layer w12: R27.1 3471.03,2669 3465.4,2663.38 U14.1 3465.4,2654.62 3468.17,2651.85 3478.31,2651.85 3501.16,2629 R23.2
NetR29_1: R29.1 U15.20 | length 663
  Top Layer w9.84: U15.20@4601,3240.53 4817.47,3240.53 4939,3119 4939,2976 4914,2951 4848.27,2951 4842.5,2956.77 4842.5,2977.92 4842,2978.42 R29.1
NetR30_1: R30.1 U15.41 | length 152.1
  Top Layer w9.84: R30.1 4209,3265 4233.47,3240.53 U15.41@4281,3240.53
NetR31_1: R31.1 U15.42 | length 199.9
  Top Layer w9.84: R31.1 4192,3240 4211.16,3220.84 U15.42@4281,3220.84
NetR32_1: R32.1 U15.43 | length 147.3
  Top Layer w9.84: R32.1 4177,3214 4189.84,3201.16 U15.43@4281,3201.16
NetR33_1: R33.1 U15.45 | length 203.3
  Top Layer w9.84: R33.1 4156,3189 4183.21,3161.79 U15.45@4281,3161.79
NetR34_1: R34.1 U15.46 | length 153.7
  Top Layer w9.84: R34.1 4139,3161.16 4158.06,3142.1 U15.46@4281,3142.1
NetR36_1: R36.1 U15.44 | length 683.6
  Top Layer w9.84: U15.44@4281,3181.47 4346.53,3181.47 v1(4347,3181) ; v1(4792,2957) R36.1
  Bottom Layer w9.84: v1(4347,3181) 4665,3181 4793,3053 4793,2958 v1(4792,2957)
NRST: C50.1 R38.1 SW2.1 U15.7 | length 519.7
  Top Layer w9.84: U15.7@4450.84,3051 4450.84,3105.84 4474,3129 4522,3129 4593.44,3057.56 4593.44,2978.56 4612.89,2959.11 R38.1 4639.86,2959.03 R38.1@4640,2959.03 ; SW2.1 4641,2958.03 R38.1@4640,2959.03 ; C50.1 4670.84,2959.03 R38.1@4640,2959.03
OSC_IN: C48.2 U15.5 X2.1 | length 226.3
  Top Layer w9.84: C48.2 4324.1,2947 X2.1 4352.1,2922.94 4411.47,2982.31 U15.5@4411.47,3051
OSC_OUT: C49.2 U15.6 X2.2 | length 225.6
  Top Layer w9.84: U15.6@4431.16,3051 4431.16,2981.68 4489.9,2922.94 X2.2
  Top Layer w12: X2.2 4516.9,2946 C49.2
SCLK: R30.2 U6.24 | length 87
  Top Layer w13.78: U6.24 4105.4,3266.13 R30.2@4105.81,3266.54
SWCLK: J10.2 U15.37 | length 195.6
  Top Layer w9.84: J10.2 4281,3505 U15.37@4281,3319.27
SWDIO: J10.3 U15.34 | length 141.8
  Top Layer w9.84: U15.34@4372.1,3371 4372.1,3510.1 J10.3
VIN: C3.2 C4.2 C14.1 J1.1 JP1.2 R6.1 U1.12-13
VREFP: C13.2 R1.2 U4.1 U6.4 | length 342
  Top Layer w12: U6.4 3822.72,3291.72 3845.46,3314.46 R1.2 R1.2@3845.46,3451 ; C13.2 R1.2@3845.46,3451 ; U4.1 3852.49,3488.6 3845.46,3481.57 R1.2@3845.46,3451
XTAL1: C38.2 U6.19 X1.1 | length 461.2
  Top Layer w12: X1.1@3808,2827 C38.2 3808,3034 3912.18,3138.18 U6.19
XTAL2: C39.2 U6.18 X1.2 | length 384.8
  Top Layer w12: U6.18 4089.41,3112.59 4159,3043 C39.2 X1.2@4159,2827
pads on no net: J10.4 U15.2 U15.3 U15.4 U15.10 U15.11 U15.12 U15.13 U15.14 U15.15 U15.16 U15.17 U15.18 U15.19 U15.21 U15.22 U15.25 U15.26 U15.27 U15.28 U15.29 U15.32 U15.33 U15.38 U15.39 U15.40

## Polygon pours and split planes (outlines as drawn)
GND on Top Layer "NONET_L-01_P-001" (solid, remove dead copper, pour order 21): 4106,2415 4086,2415 4055,2384 3904,2384 3902,2382 3902,2364 3933,2333 4060,2333 4106,2379
GND on Top Layer "NONET_L-01_P-001" (solid, remove dead copper, pour order 20): 4255.95,2415.49 4255,2414.54 4255,2332 4286,2301 4290,2297 4426,2297 4431,2302 4431,2339 4404,2366 4317,2366 4275.8,2407.2 4275.8,2415.03 4275.35,2415.49
GND on Top Layer "NONET_L-01_P-001" (solid, remove dead copper, pour order 19): 3877,2525 3884,2518 4073,2518 4077,2522 4077,2568 4068,2577 4048,2577 4037,2566 3960,2566 3908,2566 3895,2553 3877,2535
GND on Top Layer "NONET_L-01_P-001" (solid, remove dead copper, pour order 17): 3855,3836 3855,3805 3881,3779 3881,3712 3870,3701 3839,3701 3827,3689 3812,3689 3810,3687 3810,3678 3812,3676 3832,3676 3842,3686 3849,3686 3879,3656 3930,3656 3941,3667 3941,3790 3953,3802 3953,3830 3948,3835
+3.3 on Top Layer "NONET_L-01_P-001" (solid, remove dead copper, pour order 14): 4003.06,3068.33 3999,3064.26 3999,3033 4003.09,3028.91 4033.09,3028.91 4041,3021 4041,2977 4043,2975 4079,2975 4086,2982 4086,3019 4079,3026 4065,3026 4054,3037 4054,3057 4042.67,3068.33
L1 on Top Layer "NONET_L-01_P-001" (solid, remove dead copper, pour order 12): 4195.98,2473.7 4193.68,2471.4 4193.68,2418.91 4199.59,2413 4199.59,2397.07 4196.53,2394.01 4196.53,2315.03 4197.49,2314.07 4229.59,2314.07 4231.59,2316.07 4231.59,2417.07 4207.45,2441.2 4207.45,2471.42 4205.17,2473.7
L2 on Top Layer "NONET_L-01_P-001" (solid, remove dead copper, pour order 11): 4165.78,2473.71 4168.09,2471.41 4168.09,2418.91 4162,2412.82 4162,2397 4165.05,2393.95 4165.05,2314.96 4164.09,2314 4132,2314 4127,2319 4127,2417 4130,2417 4154.25,2441.25 4154.25,2471.36 4156.6,2473.71
+3.3 on Top Layer "NONET_L-01_P-001" (solid, remove dead copper, pour order 10): 3673,2663 3673,2472 3718,2427 3718,2346 3762,2346 3762,2427 3831,2496 3831,2664
+5.5 on Top Layer "NONET_L-01_P-001" (solid, remove dead copper, pour order 2): 3970,3823 3968,3821 3968,3791 3953,3775 3953,3741 3956,3738 4005.98,3738 4013,3745.02 4013,3791.78 3982.74,3823
+5 on Top Layer "NONET_L-01_P-001" (solid, remove dead copper, pour order 7): 3990,3584 3990,3470 3997,3463 4038,3463 4073,3498 4073,3526 4009.39,3589.61 3995.61,3589.61
+5 on Top Layer "NONET_L-01_P-001" (solid, remove dead copper, pour order 6): 3666,3382 3666,3381 3666,3362 3667,3361 3754.38,3361 3761,3367.62 3761,3404 3688,3404
VIN on Top Layer "NONET_L-01_P-001" (solid, remove dead copper, pour order 0): 4222.21,2469.38 4224.67,2471.84 4320.84,2471.84 4389.45,2540.45 4602.9,2540.45 4653.31,2490.04 4653.31,2453.39 4627.31,2427.4 4444.4,2427.4 4428,2411 4290,2411 4268,2433 4255,2433 4250,2438 4224.83,2438 4222.21,2440.63
+5.5 on Top Layer "NONET_L-01_P-001" (solid, remove dead copper, pour order 1): 4137.24,2471.76 4139.58,2469.42 4139.58,2440.58 4137.26,2438.26 4111.26,2438.26 4106,2433 4085,2433 4070,2418 3907,2418 3850,2361 3850,2323 3840,2313 3820,2313 3811,2322 3811,2421 3889,2499 4046,2499 4077,2468 4110.53,2468 4114.29,2471.76
+5 on Top Layer "NONET_L-01_P-001" (solid, remove dead copper, pour order 5): 3781,3811.11 3781,3786 3811,3756 3831,3756 3837,3750 3837,3741 3839,3739 3867,3739 3869,3741 3869,3775 3862,3782 3849,3782 3826,3805 3826,3834.76 3824.76,3836 3805.89,3836
GND on Bottom Layer "NONET_L-01_P-001" (solid, remove dead copper, pour order 26): 2799,3960 5099,3960 5099,2107 2799,2107
+5.5 on Bottom Layer "NONET_L-01_P-001" (solid, remove dead copper, pour order 4): 3981,2521 3967,2507 4035,2507 4021,2521
GND on Layer 2 "NONET_L-01_P-001" (solid, remove dead copper, pour order 25): 2799,3960 5099,3960 5099,2107 2799,2107
+3.3 on Layer 2 "NONET_L-01_P-001" (solid, remove dead copper, pour order 13): 3673,2472 3680,2465 3800,2465 3831,2496 3831,2579 3877,2625 4022,2625 4046,2649 4046,2942 4104,3000 4591,3000 4613,2978 4623,2978 4630,2985 4630,3170 4854,3394 4854,3406 4849,3411 4373,3411 4338,3446 4328.06,3446 4321,3438.94 3932.06,3050 3702,3050 3586,2934 3586,2559
+5 on Layer 2 "NONET_L-01_P-001" (solid, remove dead copper, pour order 9): 3788,3818 3781,3811 3781,3786 3517,3522 3437,3522 3431,3516 3431,2559 3438,2552 3448,2552 3455,2559 3455,2567 3501,2613 3501,3319 3514,3332 3650,3332 3809,3491 4067,3491 4073,3497 4073,3508 3836,3745 3836,3780 3798,3818
GND on Layer 1 "NONET_L-01_P-001" (solid, remove dead copper, pour order 15): 2799,3960 5099,3960 5099,2107 2799,2107

## Other copper
Layer 1:
  pour cut-out: 4180,2570 4180,2550 4080,2550 4080,2370 4280,2370 4280,2550 4180,2550 4180,2570 4290,2570 4290,2350 4050,2350 4050,2570

## Silkscreen, mask and mechanical layers (free items; w line width, h text height)
Top Overlay:
  text "AIN0" at 3507,3695 h60
  text "AIN1" at 3110,3690 h60
  text "AIN2" at 2990,3610 h60
  text "GND" at 4205,3590 h60 r90
  text "SWCLK" at 4300,3590 h60 r90
  text "SWDIO" at 4400,3590 h60 r90
  text "NC" at 4505,3590 h60 r90
  text "GND" at 4615,3590 h60 r90
  text "MCU_RX" at 4715,3590 h60 r90
  text "MCU_TX" at 4815,3590 h60 r90
  text "1" at 4889,3328 h40
  text "AIN3" at 3010,3210 h60
  text "BOOT0" at 4714,3096 h40 r90
  text "BOOT1" at 4964,3096 h40 r90
  text "0" at 4885,3032 h40
  text "JLCJLCJLCJLC" at 3834.93,3019.03 h40 r70
  text "AIN4" at 3010,2810 h60
  text "RST" at 4738,2707 h40
  text "3V-12V" at 4309,2681 h40
  text "AIN5" at 3010,2410 h60
  text "AIN6" at 3110,2310 h60
  text "AIN7" at 3410,2310 h60
  text "VIN" at 4383,2197 h80
Mechanical 1:
  the board outline again, w20

## Text inside footprints (layer, text, board x,y; h text height)
SW1: Top Overlay "ON" at 4762,3266.77 h39.37